# Altium PCB PCB_BBQ20_USB_Keyboard.pcbdoc
Units mil, origin at the board's own origin, x right, y up, seen from the top; angles counter-clockwise.
Board outline 4814 x 3968 mil, 2 copper layers (Top Layer, Bottom Layer); 64 components, 71 nets, 262 pads, 272 vias.
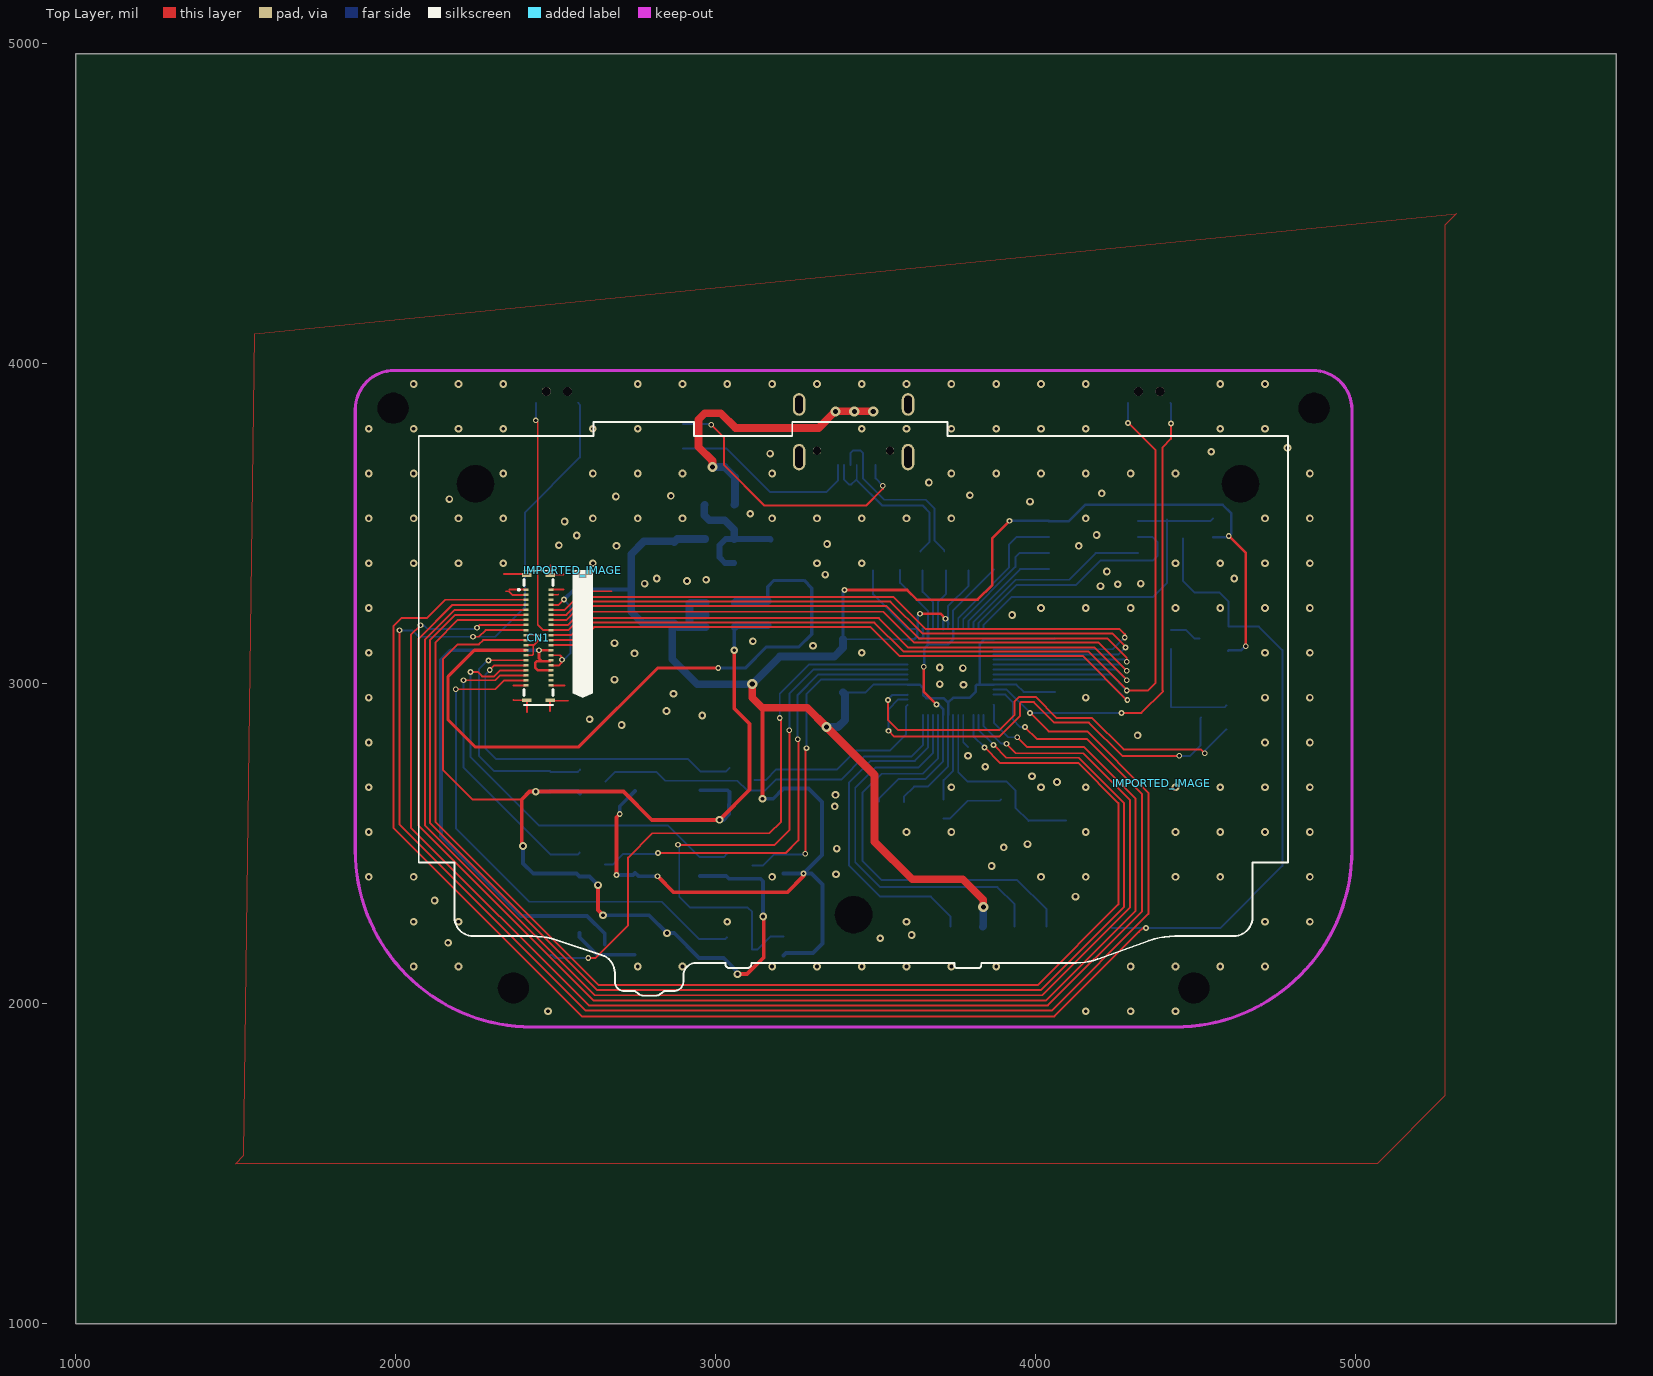
[diagram p0: Top Layer view]
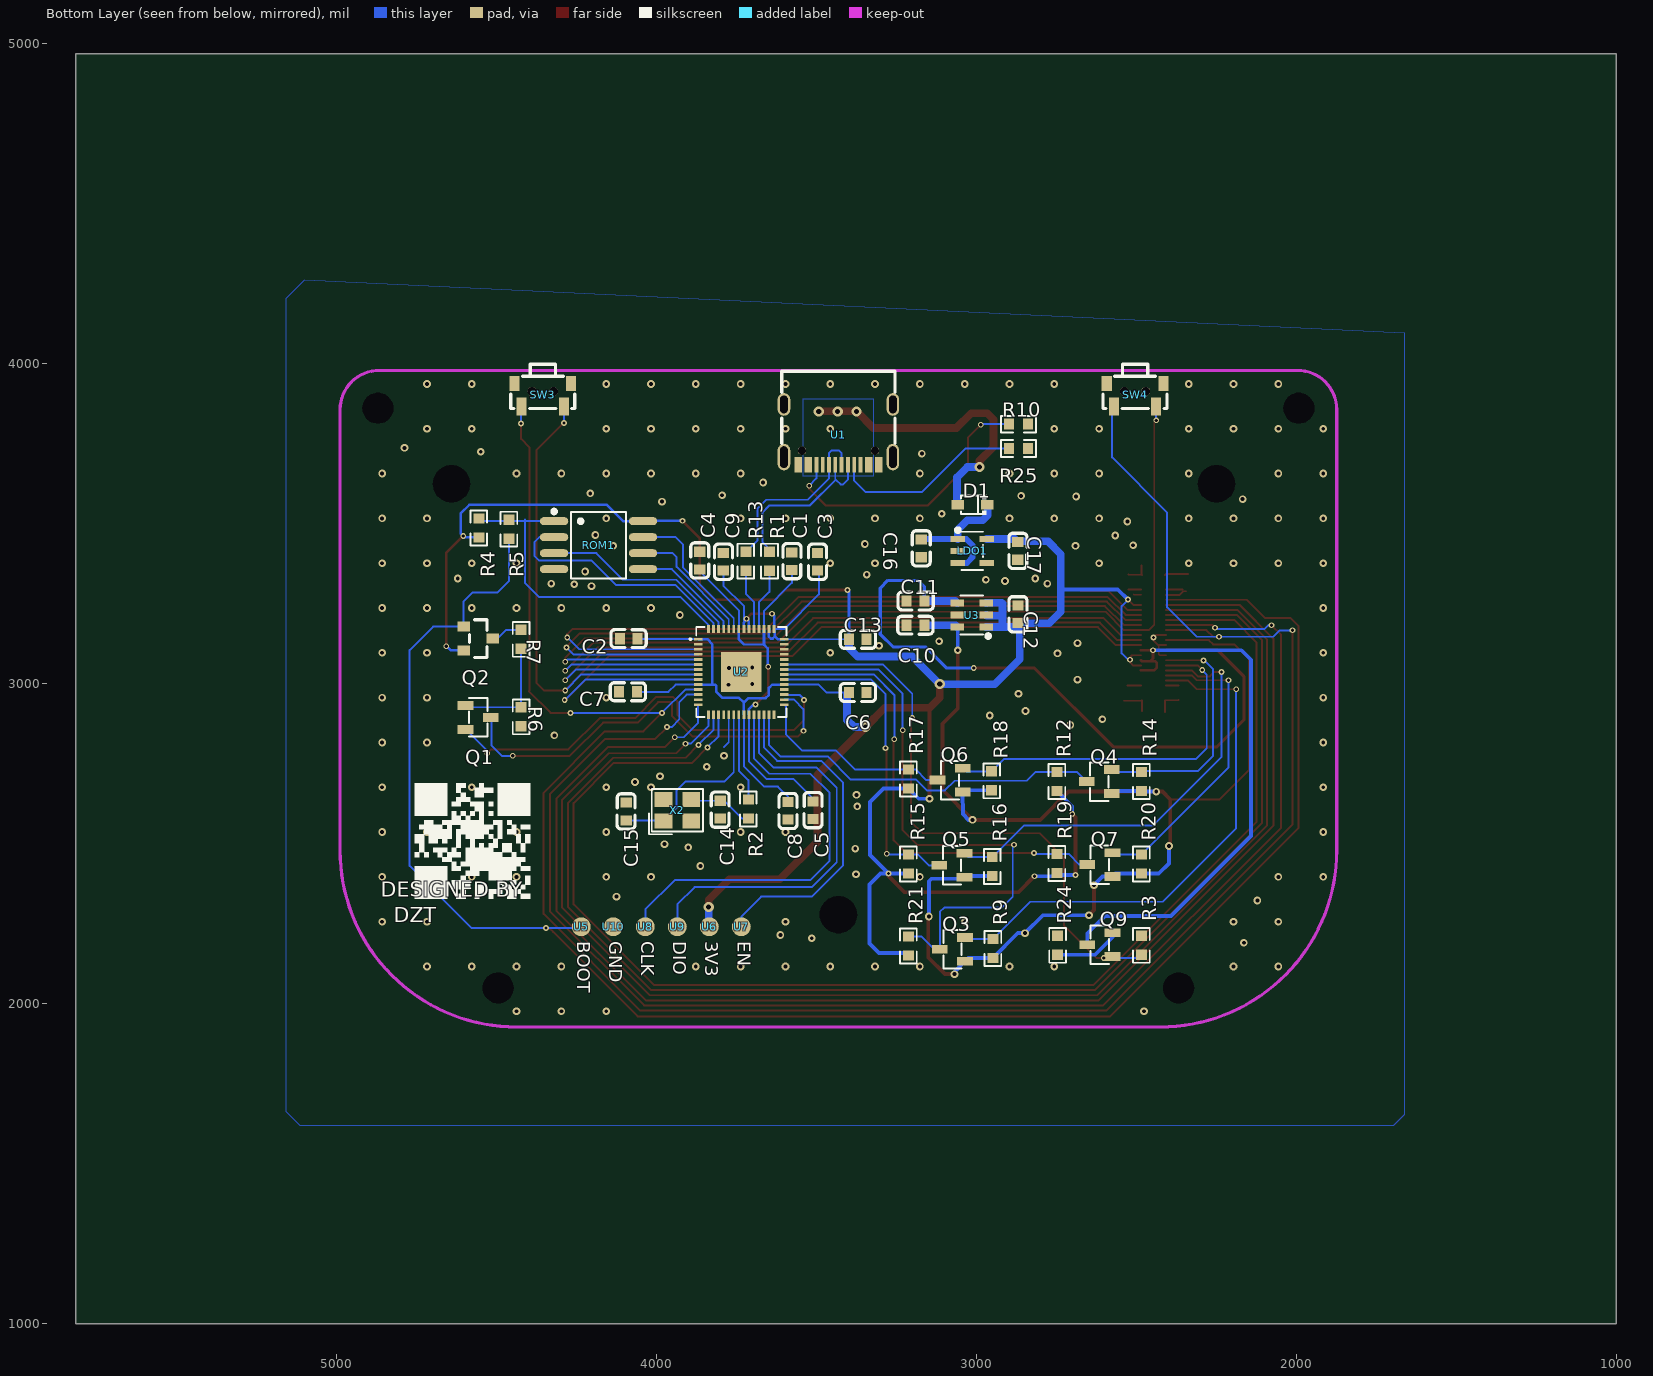
[diagram p1: Bottom Layer view, seen from below]

## Layer stack, top to bottom
Top Layer: signal copper (thickness not stored)
Dielectric: dielectric 12.6, FR-4, Dk 4.8
Bottom Layer: signal copper (thickness not stored)

## Board outline
5814,1000 1000,1000 1000,4968 5814,4968
cut-out: 2319.39,2048.87 cw(c2367.7,2048.87) 2416.01,2048.87 cw(c2367.7,2048.87) 2319.39,2048.87
cut-out: 4445.37,2048.87 cw(c4493.68,2048.87) 4541.99,2048.87 cw(c4493.68,2048.87) 4445.37,2048.87
cut-out: 4820.96,3859.89 cw(c4869.27,3859.89) 4917.58,3859.89 cw(c4869.27,3859.89) 4820.96,3859.89
cut-out: 1943.8,3859.89 cw(c1992.11,3859.89) 2040.42,3859.89 cw(c1992.11,3859.89) 1943.8,3859.89
cut-out: 4581.2,3623.67 cw(c4639.35,3623.67) 4697.5,3623.67 cw(c4639.35,3623.67) 4581.2,3623.67
cut-out: 2191.44,3623.67 cw(c2249.59,3623.67) 2307.74,3623.67 cw(c2249.59,3623.67) 2191.44,3623.67
cut-out: 3372.54,2278 cw(c3430.69,2278) 3488.84,2278 cw(c3430.69,2278) 3372.54,2278

## Components (designator, comment, footprint, x,y, rotation, side; value= is the part's Value field where it differs from the comment)
C1 "100nF" C0603 3576,3382 r90 bottom
C2 "100nF" C0603 4086,3140 r0 bottom
C3 "100nF" C0603 3496,3380 r90 bottom
C4 "100nF" C0603 3864,3384 r90 bottom
C5 "100nF" C0603 3510,2604 r90 bottom
C6 "100nF" C0603 3370,2972 r180 bottom
C7 "100nF" C0603 4088,2974 r0 bottom
C8 "100nF" C0603 3588,2602 r270 bottom
C9 "100nF" C0603 3790,3380 r90 bottom
C10 "10uF" C0603 3189.9,3181.9 r0 bottom
C11 "10uF" C0603 3189.9,3257.9 r180 bottom
C12 "10uF" C0603 2869.9,3215.9 r90 bottom
C13 "100nF" C0603 3370,3138 r180 bottom
C14 "20pF" C0603 3800,2606 r270 bottom
C15 "20pF" C0603 4094,2600 r90 bottom
C16 "10uF" C0603 3172,3422 r90 bottom
C17 "10uF" C0603 2870,3414 r90 bottom
CN1 "BM20B(0.8)-40DS-0.4V(51)" CONN-SMD_BM20B-0.8-40DS-0.4V-51 2446.44,3143.36 r90 top
D1 "B5819WS" SOD-323_L1.8-W1.3-LS2.5-RD 3012,3558 r180 bottom
IMPORTED_IMAGE "IMPORTED_IMAGE" IMPORTED_IMAGE 4394,2688 r0 top
IMPORTED_IMAGE "IMPORTED_IMAGE" IMPORTED_IMAGE 2554,3353 r0 top
LDO1 "ME6211C33M5G-N" SOT-23-5_L3.0-W1.7-P0.95-LS2.8-BL 3012.47,3414 r90 bottom
Q1 "S8050" SOT-23-3_L2.9-W1.3-P1.90-LS2.4-BR 4556,2894 r180 bottom
Q2 "AO3401A_C347476" SOT-23_L2.9-W1.3-P1.90-LS2.4-BR 4556,3140 r180 bottom
Q3 "AO3400A_C347475" SOT-23-3_L2.9-W1.3-P1.90-LS2.4-BR 3074.39,2169.45 r0 bottom
Q4 "AO3400A_C347475" SOT-23-3_L2.9-W1.3-P1.90-LS2.4-BR 2615.88,2693.46 r0 bottom
Q5 "AO3400A_C347475" SOT-23-3_L2.9-W1.3-P1.90-LS2.4-BR 3076,2432 r0 bottom
Q6 "AO3400A_C347475" SOT-23-3_L2.9-W1.3-P1.90-LS2.4-BR 3082,2698.03 r0 bottom
Q7 "AO3400A_C347475" SOT-23-3_L2.9-W1.3-P1.90-LS2.4-BR 2614,2434 r0 bottom
Q9 "AO3400A_C347475" SOT-23-3_L2.9-W1.3-P1.90-LS2.4-BR 2614,2184 r0 bottom
R1 "27Ω" R0603 3646,3382 r270 bottom
R2 "1kΩ" R0603 3712,2608 r270 bottom
R3 "10kΩ" R0603 2484,2182 r90 bottom
R4 "10kΩ" R0603 4554,3486 r90 bottom
R5 "1kΩ" R0603 4460,3482 r90 bottom
R6 "10kΩ" R0603 4422,2896 r270 bottom
R7 "10kΩ" R0603 4422,3138 r90 bottom
R9 "10kΩ" R0603 2948,2172 r90 bottom
R10 "5.1kΩ" R0603 2868,3810 r180 bottom
R12 "10kΩ" R0603 2748,2694 r90 bottom
R13 "27Ω" R0603 3720,3382 r270 bottom
R14 "10kΩ" R0603 2484,2694 r90 bottom
R15 "10kΩ" R0603 3212,2436 r90 bottom
R16 "10kΩ" R0603 2950,2428 r90 bottom
R17 "10kΩ" R0603 3212,2702 r90 bottom
R18 "10kΩ" R0603 2952,2696 r90 bottom
R19 "10kΩ" R0603 2748,2438 r90 bottom
R20 "10kΩ" R0603 2484,2436 r90 bottom
R21 "10kΩ" R0603 3212,2180 r90 bottom
R24 "10Ω" R0603 2746,2182 r90 bottom
R25 "5.1kΩ" R0603 2868,3734 r180 bottom
ROM1 "W25Q16JVSSIQ" SOIC-8_L5.3-W5.3-P1.27-LS8.0-BL 4180,3432 r90 bottom
SW3 "GT-TC018A-H0375-L1" SW-SMD_L4.7-W3.5-P3.35-EH 4354.31,3901.23 r0 bottom
SW4 "GT-TC018A-H0375-L1" SW-SMD_L4.7-W3.5-P3.35-EH 2503.92,3901.23 r0 bottom
U1 "GT-USB-7010ASV" USB-C-SMD_G-SWITCH_GT-USB-7010ASV 3430.69,3777.21 r180 bottom
U2 "RP2040" QFN-56_L7.0-W7.0-P0.90-TL-EP3.2 3734,3036 r0 bottom
U3 "VRD1828MTX" SOT-23-6_L2.9-W1.6-P0.95-LS2.8-BL 3013.9,3213.9 r270 bottom
U5 "NO" 测试焊盘 4234,2240 r0 bottom
U6 "NO" 测试焊盘 3834,2240 r0 bottom
U7 "NO" 测试焊盘 3734.01,2240 r0 bottom
U8 "NO" 测试焊盘 4034,2240 r0 bottom
U9 "NO" 测试焊盘 3934.01,2240 r0 bottom
U10 "NO" 测试焊盘 4134,2240 r0 bottom
X2 "12MHz" CRYSTAL-SMD_4P-L3.2-W2.5-BL 3934,2604 r0 bottom

## Footprints (in the part's own frame and the unit in brackets; to place one, negate y for a bottom-side part, rotate by r counter-clockwise, add the part's x,y. Pads: shape width x height; smd on the part's side, far side on the other; paste and mask are expansions set on the pad)
C0603 [mm]
  rect 0.8x0.9 smd paste+0 mask+0.051: 1(0.7,0) 2(-0.7,0)
  silkscreen extent -1.39,-0.72 1.41,0.71
CONN-SMD_BM20B-0.8-40DS-0.4V-51 [mm]
  rect 0.2x0.42 smd paste+0 mask+0.051: 1(3.8,0.99) 2(3.8,-0.99) 3(3.4,0.99) 4(3.4,-0.99) 5(3,0.99) 6(3,-0.99) 7(2.6,0.99) 8(2.6,-0.99) 9(2.2,0.99) 10(2.2,-0.99) 11(1.8,0.99) 12(1.8,-0.99) 13(1.4,0.99) 14(1.4,-0.99) 15(1,0.99) 16(1,-0.99) 17(0.6,0.99) 18(0.6,-0.99) 19(0.2,0.99) 20(0.2,-0.99) 21(-0.2,0.99) 22(-0.2,-0.99) 23(-0.6,0.99) 24(-0.6,-0.99) 25(-1,0.99) 26(-1,-0.99) 27(-1.4,0.99) 28(-1.4,-0.99) 29(-1.8,0.99) 30(-1.8,-0.99) 31(-2.2,0.99) 32(-2.2,-0.99) 33(-2.6,0.99) 34(-2.6,-0.99) 35(-3,0.99) 36(-3,-0.99) 37(-3.4,0.99) 38(-3.4,-0.99) 39(-3.8,0.99) 40(-3.8,-0.99)
  rect 0.3x0.75 smd paste+0 mask+0.051: 41(-4.975,0.925) 41(-4.975,-0.925) 42(4.975,-0.925) 42(4.975,0.925)
  silkscreen extent -5.33,-1.15 5.3,1.64
CRYSTAL-SMD_4P-L3.2-W2.5-BL [mm]
  rect 1.4x1.2 smd paste+0 mask+0.051: 1(1.1,0.85) 2(-1.1,0.85) 3(-1.1,-0.85) 4(1.1,-0.85)
  silkscreen extent -2.03,-1.68 2.26,1.91
IMPORTED_IMAGE [mil]
QFN-56_L7.0-W7.0-P0.90-TL-EP3.2 [mm]
  rect 0.665x0.224 smd paste+0 mask+0.051: 1(3.407,-2.6) 2(3.407,-2.2) 3(3.407,-1.8) 4(3.407,-1.4) 5(3.407,-1) 6(3.407,-0.6) 7(3.407,-0.2) 8(3.407,0.2) 9(3.407,0.6) 10(3.407,1) 11(3.407,1.4) 12(3.407,1.8) 13(3.407,2.2) 14(3.407,2.6) 29(-3.408,2.6) 30(-3.408,2.2) 31(-3.408,1.8) 32(-3.408,1.4) 33(-3.408,1) 34(-3.408,0.6) 35(-3.408,0.2) 36(-3.408,-0.2) 37(-3.408,-0.6) 38(-3.408,-1) 39(-3.408,-1.4) 40(-3.408,-1.8) 41(-3.408,-2.2) 42(-3.408,-2.6)
  rect 0.224x0.665 smd paste+0 mask+0.051: 15(2.6,3.407) 16(2.2,3.407) 17(1.8,3.407) 18(1.4,3.407) 19(1,3.407) 20(0.6,3.407) 21(0.2,3.407) 22(-0.2,3.407) 23(-0.6,3.407) 24(-1,3.407) 25(-1.4,3.407) 26(-1.8,3.407) 27(-2.2,3.407) 28(-2.6,3.407) 43(-2.6,-3.408) 44(-2.2,-3.408) 45(-1.8,-3.408) 46(-1.4,-3.408) 47(-1,-3.408) 48(-0.6,-3.408) 49(-0.2,-3.408) 50(0.2,-3.408) 51(0.6,-3.408) 52(1,-3.408) 53(1.4,-3.408) 54(1.8,-3.408) 55(2.2,-3.408) 56(2.6,-3.408)
  rect 3.2x3.2 smd paste+0 mask+0.051: 57(0,0)
  silkscreen extent -3.58,-3.58 4.11,3.58
R0603 [mil]
  rect 31.75x34.02 smd paste-3937.01 mask+2: 1(29.66,0) 2(-29.66,0)
  silkscreen extent -55,-26 55,26
SOD-323_L1.8-W1.3-LS2.5-RD [mm]
  rect 1x0.75 smd paste+0 mask+0.051: 1(1.173,0) 2(-1.173,0)
  silkscreen extent -0.9,-0.8 1.08,0.8
SOIC-8_L5.3-W5.3-P1.27-LS8.0-BL [mm]
  oval 0.63x2.25 smd paste+0 mask+0.051: 1(1.905,3.53) 2(0.635,3.53) 3(-0.635,3.53) 4(-1.905,3.53) 5(-1.905,-3.53) 6(-0.635,-3.53) 7(0.635,-3.53) 8(1.905,-3.53)
  silkscreen extent -2.64,-2.18 2.82,3.68
SOT-23-3_L2.9-W1.3-P1.90-LS2.4-BR [mm]
  rect 1.25x0.7 smd paste+0 mask+0.051: 1(-1,0.95) 2(-1,-0.95) 3(1,0)
  silkscreen extent -0.73,-1.53 0.73,1.53
SOT-23-5_L3.0-W1.7-P0.95-LS2.8-BL [mm]
  rect 0.49x1.157 smd paste+0 mask+0.051: 1(0.95,1.154) 2(0,1.154) 3(-0.95,1.154)
  rect 0.49x1.175 smd paste+0 mask+0.051: 4(-0.95,-1.154) 5(0.95,-1.154)
  silkscreen extent -1.53,-0.85 1.8,1.29
SOT-23-6_L2.9-W1.6-P0.95-LS2.8-BL [mm]
  rect 0.532x1.072 smd paste+0 mask+0.051: 1(0.95,1.149) 2(0,1.149) 3(-0.95,1.149) 4(-0.95,-1.149) 5(0,-1.149) 6(0.95,-1.149)
  silkscreen extent -1.54,-0.89 1.82,1.45
SOT-23_L2.9-W1.3-P1.90-LS2.4-BR [mm]
  rect 1x0.8 smd paste+0 mask+0.051: 1(-1.15,0.95) 2(-1.15,-0.95) 3(1.15,0)
  silkscreen extent -0.7,-1.5 0.7,1.5
SW-SMD_L4.7-W3.5-P3.35-EH [mm]
  rect 0.8x1.4 smd paste+0 mask+0.051: 1(1.675,0.918) 2(-1.675,0.918)
  rect 0.8x1.2 smd paste+0 mask+0.051: 3(2.25,-0.917) 4(-2.25,-0.917)
  round 0.7 hole 0.7 unplated paste+0: ""(-0.85,-0.282) ""(0.85,-0.282)
  silkscreen extent -2.54,-2.43 2.54,1.07
USB-C-SMD_G-SWITCH_GT-USB-7010ASV [mm]
  oval 1x2.1 hole 0.6 slot 1.7 at 90 deg paste+0 mask+0.05: 1(4.32,-1.78) 2(-4.32,-1.78)
  oval 1x1.8 hole 0.6 slot 1.4 at 90 deg paste+0 mask+0.05: 3(-4.32,2.4) 4(4.32,2.4)
  rect 0.6x1.24 smd paste-100 mask+0.05: A1B12(3.2,-2.4) A4B9(2.4,-2.4) B1A12(-3.2,-2.4) B4A9(-2.4,-2.4)
  rect 0.3x1.24 smd paste-100 mask+0.05: A5(1.25,-2.4) A6(0.25,-2.4) A7(-0.25,-2.4) A8(-1.25,-2.4) B5(-1.75,-2.4) B6(-0.75,-2.4) B7(0.75,-2.4) B8(1.75,-2.4)
  round 0.65 hole 0.65 unplated paste+0: ""(-2.89,-1.28) ""(2.9,-1.28)
  silkscreen extent -4.5,-0.69 4.5,5.03
测试焊盘 [mil]
  round 59.05 smd paste+0 mask+4: 1(0,0)

## Via types
v1: diameter 24, hole 12, Top Layer to Bottom Layer, tented both sides, 207 vias
v2: diameter 18, hole 10, Top Layer to Bottom Layer, tented both sides, 58 vias
v3: diameter 32, hole 16, Top Layer to Bottom Layer, tented both sides, 7 vias

## Nets (pads, with @x,y where several pads share a name; then routed paths per layer and width w, separated by ;. In a path a pad name is that pad's centre, name@x,y a point inside that pad or via, vN(x,y) a via of type N, cw(c..) or ccw(c..) an arc to the next point about the centre after c; other vN are vias at no path point)
1V1: C1.2 C4.2 C5.1 U2.23 U2.45 U2.50 | length 1282.1
  Top Layer w8: v2(3650,3052) 3650,2974 v2(3690,2934)
  Bottom Layer w6: C5.1 3510,2640 3572,2702 3656,2702 3710.38,2756.38 U2.23 ; C1.2 3576,3314 3663.14,3226.86 U2.45 ; U2.50 3741.9,3228.3 C4.2@3870,3356.4
  Bottom Layer w8: v2(3650,3052) 3652,3054 3652,3110 3663.14,3121.14 U2.45 ; 3663.1,3121.1 3726,3122 3741.9,3137.9 U2.50 ; v2(3690,2934) 3696,2934 3710.38,2919.62 U2.23
1V8: C10.2 CN1.21 Q3.1 Q4.1 Q5.1 Q6.1 Q7.1 R9.2 R14.2 R16.2 R18.2 R20.2 U3.6 | length 4299.9
  Top Layer w6: 2394,2638 2240,2638 2148,2730 2148,3010 2148,3076 2194,3122 2260,3122 2273.49,3135.49 CN1.21
  Top Layer w12: v1(2398,2492) 2394,2496 2394,2638 2418,2662 v1(2438,2662) 2712,2662 2800,2574 v1(3012,2574) 3106,2668 3106,2874 3058,2922 v1(3058,3104) ; v1(2632,2370) 2632,2292 v1(2648,2276) ; v1(3068,2092) 3098,2092 3150,2144 3150,2270 v1(3148,2272)
  Bottom Layer w12: v1(2398,2492) 2398,2438 2430,2406 R20.2 ; v1(2438,2662) 2481.66,2662 R14.2 2568.23,2664.34 Q4.1 ; R20.2 2564.89,2406.34 Q7.1 2605.4,2396.6 v1(2632,2370) ; v1(2648,2276) 2792,2276 v1(2848,2220) 2870.34,2220 R9.2 3024.73,2142.34 Q3.1 3068,2099.07 v1(3068,2092) ; R16.2 3032.89,2398.34 Q5.1 3041.23,2390 3140,2390 3148,2382 v1(3148,2272) ; R18.2 3036.92,2666.34 Q6.1 ; v1(3012,2574) 3024,2574 3042,2592 Q6.1 ; v1(3058,3104) 3058,3175.36 U3.6
  Bottom Layer w24: U3.6 3064.54,3181.9 C10.2
2V8: C11.1 CN1.25 U3.4 | length 2180.1
  Top Layer w10: CN1.25 2246,3104 2164,3022 2164,2886 2248,2802 2572,2802 2818,3048 v2(3008,3048)
  Bottom Layer w10: v2(3008,3048) 3092,3048 3158,3114 3260,3114 3300,3154 3300,3298 3276,3322 3182,3322 3162.34,3302.34 C11.1
  Bottom Layer w24: U3.4 3065.74,3257.9 C11.1
3V3: C2.2 C3.2 C6.2 C7.2 C8.2 C9.2 C12.2 C13.2 C17.1 CN1.8 CN1.28 CN1.32 LDO1.5 Q2.2 R4.2 R12.2 R15.2 R17.2 R19.2 R21.2 ROM1.8 U2.1 U2.10 U2.22 U2.33 U2.42 U2.43 U2.44 U2.48 U2.49 U3.1 U3.2 U3.3 U6.1 | length 10329.5
  Top Layer w6: CN1.32 2510.8,3056.7 2518,3064 2518,3084 2514,3088 CN1.28 ; CN1.8 2509.73,3245.73 v2(2526,3262)
  Top Layer w8: v2(3402,3292) 3598,3292 3628,3262 3818,3262 3864,3308 3864,3454 v2(3918,3508) ; v2(3638,3218) 3702,3218 v2(3718,3202) ; v2(4603.02,3461.02) 4656,3408.04 v2(4656,3116)
  Top Layer w12: v2(2690,2402) 2690,2582 v2(2700,2592) ; v2(2818,2398) 2868,2348 3224,2348 3274.3,2398.3 v2(3274.3,2406.3) ; v1(3146,2640) 3146,2924
  Top Layer w24: v3(3114,2998) 3114,2956 3146,2924 3286,2924 v3(3346,2864) 3496,2714 3496,2506 3614,2388 3772,2388 3836,2324 v3(3836,2302)
  Bottom Layer w6: v2(2520,3074) 2526,3074 2546,3094 2546,3242 v2(2526,3262) ; C6.2 3468,2972 3492.63,2996.63 U2.33 ; C13.2 U2.42 ; C3.2@3492,3352.44 3492,3278 3599.85,3170.15 U2.43 ; C8.2 3588,2646 3620,2678 3662,2678 3726.13,2742.13 U2.22 ; U2.49 3726.13,3242.13 3790,3306 C9.2 ; U2.10 3939.37,2996.63 3962,2974 C7.2 ; U2.1 4056.8,3138.36 C2.2
  Bottom Layer w8: C13.2 3397.56,3287.56 v2(3402,3292) ; U2.33 3637.37,2996.63 3648,2986 3648,2964 3658,2954 3712,2954 3726.13,2939.87 ; U2.42 3620.36,3138.36 3630,3148 ; v2(3638,3218) 3631.64,3211.64 U2.43 3630,3168.51 3630,3148 ; U2.44 3648,3146 3642,3140 3636,3140 3630,3146 3630,3148 ; U2.48 3710.4,3194.4 v2(3718,3202) 3726.1,3189.9 3726.1,3185.4 ; U2.22 3726.13,2939.87 ; 3824.46,2996.63 3824.46,3122.46 3840.36,3138.36 U2.1 ; U2.10 3816.63,2996.63 3812,2992 3812,2974 3794,2956 3742.26,2956 3726.13,2939.87 ; v2(3918,3508) 4040.02,3508 ROM1.8 4103,3507 4154,3558 4584,3558 4610,3532 4610,3468 v2(4603.02,3461.02) 4598.34,3456.34 R4.2 ; Q2.2 4602.68,3104 4642,3104 4654,3116 v2(4656,3116)
  Bottom Layer w12: v2(2526,3262) 2558.11,3294.11 2736,3294.11 ; v2(2690,2402) 2741.66,2402 R19.2 2758.34,2398 v2(2818,2398) ; v2(2700,2592) 2700,2616.34 R12.2 ; v1(3146,2640) 3179.66,2640 R17.2 ; R21.2 3219.66,2158 3304,2158 3334,2188 3334,2372 3299.7,2406.3 v2(3274.3,2406.3) ; R15.2 v2(3274.3,2406.3) ; R17.2 3290,2672 3332,2630 3332,2464 v2(3274.3,2406.3)
  Bottom Layer w24: 2918.07,3176.5 2918.07,3250.07 2920,3252 U3.3 ; 2924,3212 2966.76,3212 U3.2 ; LDO1.5@2967.05,3451.4 2879.84,3451.4 C17.1 2867.56,3444 2776,3444 2736,3404 2736,3224 2771.66,3188.34 C12.2 ; U3.1 2881.74,3176.5 C12.2 ; v3(3346,2864) 3382,2864 3404,2886 3404,2965.56 C6.2 ; C13.2 3397.56,3111.56 3370,3084 3200,3084 v3(3114,2998) 2942,2998 2864,3076 2864,3182.44 C12.2 ; U6.1 3836,2242 v3(3836,2302)
CN1_34: CN1.26 CN1.30 CN1.34 Q9.3 | length 1735.7
  Top Layer w8: CN1.34 2445,3041 2436,3050 2436,3064 2442,3070 2456,3070 ; CN1.30 2482.91,3070 2456,3070 ; CN1.26 v2(2448,3104) 2448,3078 2456,3070
  Bottom Layer w12: v2(2448,3104) 2172,3104 2142,3074 2142,2524 2392,2274 2598,2274 2653.4,2218.6 Q9.3
COL1: CN1.17 SW3.1 SW4.1 U2.11 | length 6990.3
  Top Layer w6: v2(2012,3166) 2012,2560 2594,1978 4050,1978 4352,2280 4352,2658 4160,2850 4040,2850 v2(3982,2908) ; v2(2242,3146) 2260,3146 2280.99,3166.99 CN1.17 ; v2(4268,2908) 4330,2908 4398,2976 4396,2978 4396,3738 4422,3764 v2(4422,3812)
  Bottom Layer w6: v2(2012,3166) 2052,3166 2072,3146 v2(2242,3146) 2312,3146 2404,3238 2404,3534 2576,3706 2576,3870.8 SW4.1@2569.9,3876.9 ; U2.11 3909.1,2980.9 v2(3982,2908) v2(4268,2908) ; SW3.1@4420.26,3876.91 4422,3875.17 v2(4422,3812)
COL2: CN1.15 U2.12 | length 4610.5
  Top Layer w6: v2(2078,3182) 2048,3152 2048,2550 2604,1994 4038,1994 4332,2288 4332,2654 4160,2826 4004,2826 v2(3966,2864) ; v2(2254,3174) 2262.74,3182.74 CN1.15
  Bottom Layer w6: v2(2078,3182) 2088,3182 2100,3170 2250,3170 v2(2254,3174) ; U2.12 3904.9,2965.1 3928,2942 3928,2888 3952,2864 v2(3966,2864)
COL3: CN1.13 U2.17 | length 4244.8
  Top Layer w6: CN1.13 2194.5,3198.5 2124,3128 2124,2568 2634,2058 4006,2058 4258,2310 4258,2626 4132,2752 3888,2752 v2(3840,2800)
  Bottom Layer w6: U2.17 3804.86,2835.14 v2(3840,2800)
COL4: CN1.11 U2.16 | length 4316.7
  Top Layer w6: CN1.11 2186.2,3214.2 2108,3136 2108,2564 2630,2042 4016,2042 4276,2302 4276,2626 4134,2768 3908,2768 v2(3868,2808)
  Bottom Layer w6: U2.16 3820.62,2855.38 v2(3868,2808)
COL5: CN1.9 U2.15 | length 4394.5
  Top Layer w6: CN1.9 2184,3230 2092,3138 2092,2556 2622,2026 4020,2026 4294,2300 4294,2636 4148,2782 3938,2782 v2(3908,2812)
  Bottom Layer w6: U2.15 3836,2868 3892,2812 v2(3908,2812)
COL6: CN1.7 U2.14 | length 4493.6
  Top Layer w6: CN1.7 2177.7,3245.7 2072,3140 2072,2556 2618,2010 4032,2010 4312,2290 4312,2640 4150,2802 3972,2802 v2(3942,2832)
  Bottom Layer w6: U2.14 3870,2931.79 3870,2876 3914,2832 v2(3942,2832)
COL7: CN1.5 Q2.1 R5.2 U5.1 | length 5657.4
  Top Layer w6: CN1.5 2155.5,3261.5 2098,3204 2018,3204 1994,3180 1994,2548 2582,1960 4058,1960 4322,2224 4334,2236 v2(4344,2236)
  Bottom Layer w6: U5.1 4238,2236 4576,2236 4770,2430 4770,3104 4696.6,3177.4 Q2.1 4601.3,3256.7 4574,3284 4496,3284 4460,3320 R5.2
COL8: Q1.3 U2.30 | length 1361.5
  Top Layer w6: v2(3540,2852) 3558,2834 3886,2834 3950,2898 3950,2938 3954,2942 3994,2942 4058,2878 4166,2878 4270,2774 v2(4448,2774)
  Bottom Layer w6: v2(3540,2852) 3540,2920 3569.4,2949.4 U2.30 ; v2(4448,2774) 4482,2774 4514,2806 4514,2891.37 Q1.3
EXTERN_5V: D1.2 U1.A4B9 U1.B4A9 | length 931.1
  Top Layer w24: v3(2990,3676) 2990,3696 2946,3740 2946,3824 2966,3844 3016,3844 3062,3798 3226,3798 3322,3798 v3(3374,3850) v3(3492,3850)
  Bottom Layer w24: v3(2990,3676) 3028,3676 3060,3644 3060,3559.84 D1.2
  other v3: 3433,3850
GND: C1.1 C2.1 C3.1 C4.1 C5.2 C6.1 C7.1 C8.1 C9.1 C10.1 C11.2 C12.1 C13.1 C14.1 C15.1 C16.2 C17.2 CN1.1 CN1.2 CN1.3 CN1.4 CN1.10 CN1.19 CN1.23 CN1.27 CN1.39 CN1.40 CN1.41 CN1.42 LDO1.2 R3.1 R6.1 R10.1 R24.1 R25.1 ROM1.4 U1.1 U1.2 U1.3 U1.4 U1.A1B12 U1.B1A12 U2.19 U2.57 U3.5 U10.1 X2.2 X2.4 | length 1044.2
  Top Layer w6: 2338,3342 2407.25,3342 CN1.42@2410.02,3339.23 ; 2344,3288 2354,3288 2366,3276 2406.23,3276 CN1.3 ; 2356,3294 2406.43,3294 CN1.1 ; 2368,2948 2410,2947.5 2410,2910 ; 2368,2994 CN1.39 ; CN1.27 2426.25,3088.25 2430,3092 2430,3118 2431.74,3119.74 ; CN1.23 2431.74,3119.74 ; CN1.19 2438.56,3151.24 v2(2446.44,3143.36) 2446.44,3134.44 2431.74,3119.74 ; 2482,2914 CN1.41@2482.9,2947.5 ; CN1.41@2482.86,2947.5 2484.36,2946 2538,2946 ; CN1.42@2482.85,3339.23 2484,3340.38 2484,3368 ; CN1.42@2482.9,3339.2 2524,3340 ; CN1.40 2528,2994 ; CN1.10 2528,3230 2586,3288 2674,3288 ; CN1.4 2508,3278 ; CN1.2 2486.44,3294 2524,3294
  Bottom Layer w6: U2.19 3773.37,2816.63 3788,2802
  other v1: 2476.2,1975.8 4156.2,1975.8 4296.2,1975.8 4436.2,1975.8 2056.2,2115.8 2196.2,2115.8 2756.2,2115.8 2896.2,2115.8 3176.2,2115.8 3316.2,2115.8 3456.2,2115.8 3596.2,2115.8 3736.2,2115.8 3876.2,2115.8 4296.2,2115.8 4436.2,2115.8 4576.2,2115.8 4716.2,2115.8 2164,2190 3514,2204 3612,2214 2056.2,2255.8 2196.2,2255.8 3036.2,2255.8 3596.2,2255.8 4716.2,2255.8 4856.2,2255.8 2122,2322 4124,2334 1916.2,2395.8 2056.2,2395.8 3176.2,2395.8 4016.2,2395.8 4156.2,2395.8 4436.2,2395.8 4576.2,2395.8 4856.2,2395.8 3376,2404 3862,2430 3378,2484 3900,2488 3974,2498 1916.2,2535.8 3596.2,2535.8 3736.2,2535.8 4156.2,2535.8 4436.2,2535.8 4576.2,2535.8 4716.2,2535.8 4856.2,2535.8 3372,2616 3374,2652 1916.2,2675.8 3736.2,2675.8 4016.2,2675.8 4156.2,2675.8 4436.2,2675.8 4576.2,2675.8 4716.2,2675.8 4856.2,2675.8 4066,2692 3988,2710 3842,2740 3788,2774 1916.2,2815.8 4716.2,2815.8 4856.2,2815.8 4318,2838 2706,2870 2606,2888 2958,2900 2846,2914 1916.2,2955.8 4156.2,2955.8 4716.2,2955.8 4856.2,2955.8 2868,2968 3774,2996 3700,2998 2684,3012 3772,3048 3700,3050 2746,3094 1916.2,3095.8 3456.2,3095.8 4716.2,3095.8 4856.2,3095.8 3304,3118 2684,3126 3116,3132 3926,3214 1916.2,3235.8 4016.2,3235.8 4156.2,3235.8 4296.2,3235.8 4436.2,3235.8 4576.2,3235.8 4716.2,3235.8 4856.2,3235.8 4202,3304 4256,3310 2778,3312 4328,3312 2910,3320 2970,3324 2816,3328 4620,3328 3342,3340 4222,3350 1916.2,3375.8 2056.2,3375.8 2196.2,3375.8 2336.2,3375.8 2616.2,3375.8 3316.2,3375.8 3456.2,3375.8 4436.2,3375.8 4576.2,3375.8 4716.2,3375.8 4856.2,3375.8 2690,3430 4134,3430 2510,3432 3348,3436 2566,3462 4190,3464 2528,3506 1916.2,3515.8 2056.2,3515.8 2196.2,3515.8 2336.2,3515.8 2616.2,3515.8 2756.2,3515.8 2896.2,3515.8 3176.2,3515.8 3316.2,3515.8 3456.2,3515.8 3596.2,3515.8 3736.2,3515.8 4156.2,3515.8 4716.2,3515.8 4856.2,3515.8 3108,3530 3982,3568 2168,3576 2688,3584 2860,3586 3794,3588 4206,3594 3666,3628 1916.2,3655.8 2056.2,3655.8 2336.2,3655.8 2616.2,3655.8 2756.2,3655.8 2896.2,3655.8 3176.2,3655.8 3736.2,3655.8 3876.2,3655.8 4016.2,3655.8 4156.2,3655.8 4296.2,3655.8 4436.2,3655.8 4856.2,3655.8 3170,3718 4548,3724 4786,3736 1916.2,3795.8 2056.2,3795.8 2196.2,3795.8 2336.2,3795.8 2616.2,3795.8 2756.2,3795.8 3456.2,3795.8 3596.2,3795.8 3736.2,3795.8 3876.2,3795.8 4016.2,3795.8 4156.2,3795.8 4576.2,3795.8 4716.2,3795.8 2056.2,3935.8 2196.2,3935.8 2336.2,3935.8 2756.2,3935.8 2896.2,3935.8 3036.2,3935.8 3176.2,3935.8 3316.2,3935.8 3456.2,3935.8 3596.2,3935.8 3736.2,3935.8 3876.2,3935.8 4016.2,3935.8 4156.2,3935.8 4576.2,3935.8 4716.2,3935.8
GPIO0: U2.2
GPIO10: U2.13
GPIO15: U2.18
GPIO16: Q4.3 R12.1 U2.27 | length 1181.5
  Bottom Layer w6: Q4.3@2655.25,2693.46 2685.45,2723.66 R12.1 2814.34,2723.66 2842,2696 3068,2696 3098,2666 3154,2666 3188,2700 3392,2700 3464,2772 3612,2772 3647.39,2807.39 U2.27
GPIO17: U2.28
GPIO18: Q6.3 R17.1 U2.29 | length 627.5
  Bottom Layer w6: Q6.3 3156,2698 3189.7,2731.7 R17.1 ; R17.1 3379.66,2731.66 3438,2790 3544,2790 3594,2840 3594,2927.79 U2.29
GPIO21: U2.32
GPIO22: Q5.3 R15.1 U2.34 | length 1015.4
  Top Layer w6: v2(3280,2468) 3280,2794 v2(3284,2798)
  Bottom Layer w6: Q5.3 3148,2432 3181.7,2465.7 R15.1 ; R15.1 3277.66,2465.66 v2(3280,2468) ; v2(3284,2798) 3284,2968 3328.4,3012.4 U2.34
GPIO23: Q7.3 R19.1 U2.35 | length 1461.3
  Top Layer w6: v2(2820,2470) 3218,2470 3258,2510 3258,2824 v2(3256,2826)
  Bottom Layer w6: Q7.3 2678,2434 2711.7,2467.7 R19.1 ; R19.1 2817.66,2467.66 v2(2820,2470) ; v2(3256,2826) 3256,2964 3320.1,3028.1 U2.35
GPIO24: Q3.3 R21.1 U2.36 | length 1837.2
  Top Layer w6: v2(2882,2496) 3184,2496 3230,2542 v2(3230,2854)
  Bottom Layer w6: v2(2882,2496) 2886,2492 2886,2334 2920,2300 3100,2300 3113.76,2286.24 Q3.3 ; Q3.3 3131.4,2169.4 3171.7,2209.7 R21.1 ; v2(3230,2854) 3230,2968 3305.9,3043.9 U2.36
GPIO26_ADC0: U2.38
GPIO27_ADC1: U2.39
GPIO28_ADC2: U2.40
GPIO29_ADC3: U2.41
KBD_BLK: Q9.1 R3.2 U2.37 | length 1864.3
  Top Layer w6: v2(2602,2142) 2624,2142 2726,2244 2726,2456 2802,2532 3168,2532 3204,2568 3204,2888 v2(3200,2892)
  Bottom Layer w6: R3.2 2487.7,2152.3 2498,2142 v2(2602,2142) ; v2(3200,2892) 3200,2968 3291.6,3059.6 U2.37
OUT: Q1.1 R6.2 R7.2 | length 358.4
  Bottom Layer w6: R7.2 R6.2 4589.63,2925.66 Q1.1
Q2_3: Q2.3 R7.1 | length 100
  Bottom Layer w6: R7.1 4467.7,3167.7 4496,3140 Q2.3
QSPI_SCLK: ROM1.6 U2.52 | length 401.5
  Bottom Layer w6: U2.52 3773.4,3201.4 3936,3364 3936,3394 3949,3407 ROM1.6
QSPI_SD0: ROM1.5 U2.53 | length 343.9
  Bottom Layer w6: U2.53 3789.1,3195.1 3951,3357 ROM1.5
QSPI_SD1: ROM1.2 U2.55 | length 775.7
  Bottom Layer w6: U2.55 3820.6,3188.6 3940,3308 4126,3308 4202,3384 4366,3384 4380,3398 4380,3442 4365,3457 ROM1.2
QSPI_SD2: ROM1.3 U2.54 | length 624.3
  Bottom Layer w6: U2.54 3804.9,3190.9 3938,3324 4104,3324 4187,3407 ROM1.3
QSPI_SD3: ROM1.7 U2.51 | length 463.9
  Bottom Layer w6: U2.51 3757.6,3203.6 3916,3362 3916,3434 3939,3457 ROM1.7
QSPI_SS: R4.1 R5.1 ROM1.1 U2.56 | length 1076.6
  Bottom Layer w6: U2.56 3836.4,3182.4 3924,3270 4366,3270 4410,3314 4410,3511.7 ; ROM1.1 4545.34,3507 R4.1
R1_1: R1.1 U2.46 | length 195.7
  Bottom Layer w6: R1.1 3646,3286 3678.9,3253.1 U2.46
R2_1: C14.2 R2.1 X2.3 | length 203.2
  Bottom Layer w6: R2.1 3732.3,2578.3 3787.6,2633.6 C14.2 ; C14.2 3886.78,2633.56 X2.3
R13_1: R13.1 U2.47 | length 192.6
  Bottom Layer w6: U2.47 3694.6,3254.6 3720,3280 R13.1
R24_2: Q9.2 R24.2 | length 208.2
  Bottom Layer w12: Q9.2 2574.6,2207.4 2629.7,2152.3 R24.2
ROW1: CN1.12 U2.3 | length 2298.8
  Top Layer w6: CN1.12 2533.77,3214.23 2590,3270 3556,3270 3656,3170 4262,3170 4278,3154 v2(4278,3144)
  Bottom Layer w6: U2.3 4240.86,3106.86 v2(4278,3144)
ROW2: CN1.14 U2.4 | length 2300.9
  Top Layer w6: CN1.14 2534.48,3198.48 2592,3256 3546,3256 3646,3156 4240,3156 4280,3116 v2(4280,3112)
  Bottom Layer w6: U2.4 4259.12,3091.12 v2(4280,3112)
ROW3: CN1.16 U2.5 | length 2321.1
  Top Layer w6: CN1.16 2538.74,3182.74 2598,3242 3534,3242 3636,3140 4224,3140 4284,3080 v2(4284,3068)
  Bottom Layer w6: U2.5 4276.63,3075.37 v2(4284,3068)
ROW4: CN1.18 SW4.2 U2.6 | length 3066.2
  Top Layer w6: v2(2438,3822) 2444,3816 2444,3184 2461,3167 CN1.18 2538.99,3166.99 2596,3224 3524,3224 3620,3128 4196,3128 v2(4284,3040)
  Bottom Layer w6: v2(2438,3822) SW4.2@2438,3876.9 ; U2.6 4264.38,3059.62 v2(4284,3040)
ROW5: CN1.20 U2.7 | length 2331.9
  Top Layer w6: CN1.20 2549.24,3151.24 2602,3204 3510,3204 3602,3112 4184,3112 4284,3012 v2(4284,3010)
  Bottom Layer w6: U2.7 4250.13,3043.87 v2(4284,3010)
ROW6: CN1.22 SW3.2 U2.8 | length 3357.2
  Top Layer w6: CN1.22 2559.49,3135.49 2614,3190 3496,3190 3586,3100 4164,3100 4284,2980 v2(4284,2978) 4350,2978 4374,3002 4374,3728 v2(4288,3814)
  Bottom Layer w6: U2.8 4233.88,3028.12 v2(4284,2978) ; v2(4288,3814) SW3.2@4288.4,3876.9
ROW7: CN1.24 U2.9 | length 2362.9
  Top Layer w6: CN1.24 2563.74,3119.74 2620,3176 3484,3176 3574,3086 4146,3086 4284,2948 v2(4286,2948)
  Bottom Layer w6: U2.9 4221.62,3012.38 v2(4286,2948)
ROW8: Q1.2 U2.31 | length 1378.5
  Top Layer w6: v2(3538,2948) 3538,2886 3570,2854 3886,2854 3934,2902 3934,2944 3948,2958 4000,2958 4066,2892 4176,2892 4274,2794 4516,2794 v2(4528,2782)
  Bottom Layer w6: v2(3538,2948) 3538,2950 3552,2964 3598.72,2964 U2.31 ; v2(4528,2782) 4528,2789.23 Q1.2
RUN: U2.26 U7.1 | length 1069.3
  Bottom Layer w6: U2.26 3663.1,2799.1 3622,2758 3484,2758 3416,2690 3416,2432 3514,2334 3672,2334 3734,2272 U7.1
S$7924: 
S$13251: 
S$26683: 
S$26687: 
S$26691: 
S$26695: 
SWCLK: U2.24 U8.1 | length 1321.7
  Bottom Layer w6: U2.24 3694.6,2766.6 3646,2718 3518,2718 3458,2658 3458,2446 3518,2386 3942,2386 4034,2294 U8.1
SWDIO: U2.25 U9.1 | length 1261.6
  Bottom Layer w6: U2.25 3678.9,2782.9 3634,2738 3500,2738 3436,2674 3436,2442 3514,2364 3880,2364 3934,2310 U9.1
TP_MOTION_1V8: CN1.33 Q5.2 R16.1 | length 1390
  Top Layer w6: v2(2234,3036) 2256,3036 2270,3022 2308,3022 2327,3041 CN1.33
  Bottom Layer w6: v2(2234,3036) 2234,2770 2448,2556 2851.66,2556 R16.1 3024.89,2457.66 Q5.2
TP_RESET_1V8: CN1.29 Q4.2 R14.1 | length 769.4
  Top Layer w6: v2(2290,3072) CN1.29
  Bottom Layer w6: v2(2290,3072) 2288,3072 2260,3044 2260,2774 2308,2726 2481.66,2726 R14.1 2569.31,2723.66 Q4.2
TP_SCL_1V8: CN1.35 Q7.2 R20.1 | length 951.9
  Top Layer w6: v2(2212,3010) 2312,3010 2327.3,3025.3 CN1.35
  Bottom Layer w6: v2(2212,3010) 2212,2737.66 R20.1 2568.89,2465.66 Q7.2
TP_SDA_1V8: CN1.31 Q6.2 R18.1 | length 1166
  Top Layer w6: v2(2294,3042) 2308.75,3056.75 CN1.31@2407.46,3056.75
  Bottom Layer w6: v2(2294,3042) 2280,3028 2280,2798 2314,2764 2913.66,2764 R18.1 3032.86,2725.66 Q6.2
TP_SHUTDOWN_1V8: CN1.37 Q3.2 R9.1 | length 1657.5
  Top Layer w6: v2(2188,2982) 2312,2982 2339.51,3009.51 CN1.37
  Bottom Layer w6: v2(2188,2982) 2188,2548 2418,2318 2831.66,2318 R9.1 3029.83,2201.66 Q3.2
U1_A5: R25.2 U1.A5 | length 604.1
  Bottom Layer w6: R25.2 3034,3734 3170,3598 3346,3598 3381.48,3633.48 U1.A5
U1_B5: R10.2 U1.B5 | length 885.5
  Top Layer w6: v2(2986,3808) 3026,3768 3026,3682 3152,3556 3470,3556 3522,3608 v2(3522,3618)
  Bottom Layer w6: R10.2 2984,3810 v2(2986,3808) ; U1.B5 3499.59,3640.41 v2(3522,3618)
USB_D+: R13.2 U1.A6 U1.B6 | length 572
  Bottom Layer w6: U1.A6@3420.9,3682.7 3420.9,3718.8 3430,3728 3452,3728 3460.2,3719.8 U1.B6 3460.2,3639.8 3526,3574 3656,3574 3684,3546 3684,3446 3714,3416 R13.2@3714,3411.7
USB_D-: R1.2 U1.A7 U1.B7 | length 547.6
  Bottom Layer w6: U1.B7 3401.16,3636.84 3416,3622 3424,3622 3437.5,3635.5 3440.5,3635.5 ; U1.A7 3440.5,3635.5 ; R1.2@3640,3411.7 3640,3414 3668,3442 3668,3534 3646,3556 3520,3556 3440.5,3635.5
VSYS: C16.1 D1.1 LDO1.1 LDO1.3 | length 434.3
  Bottom Layer w18: LDO1.3 3029.4,3376.6 3012,3394 3012,3432 3031.4,3451.4 LDO1.1 3170.16,3451.4 C16.1
  Bottom Layer w24: D1.1 2964,3556.16 2964,3526 2980,3510 3028,3510 3057.89,3480.11 LDO1.1
XIN: C15.2 U2.20 X2.1 | length 611.2
  Bottom Layer w6: U2.20 3757.62,2722.38 3786,2694 3908,2694 3936,2666 3936,2611.85 X2.1 3979.21,2572.44 C15.2
XOUT: R2.2 U2.21 | length 276.5
  Bottom Layer w6: R2.2 3712,2698 3741.9,2727.9 U2.21
pads on no net: CN1.6 CN1.36 CN1.38 LDO1.4 SW3. SW3.3 SW3.4 SW4. SW4.3 SW4.4 U1. U1.A8 U1.B8

## Polygon pours and split planes (outlines as drawn)
EXTERN_5V on Bottom Layer (solid): 3322,3648 3540,3648 3540,3890 3322,3890
GND on Bottom Layer (solid): 5100,4260 5158,4202 5158,1664 5114,1620 1696,1620 1662,1654 1662,4094
GND on Top Layer (solid): 5314,4468 5278,4432 5278,1712 5066,1500 1500,1500 1526,1526 1560,4092

## Keep-outs
Keep-Out Layer:
  lines w10: 1874,2478 ccw(c2425.18,2478) 2425.18,1926.82 ; 4436.2,1926.82 ccw(c4436.2,2478) 4987.38,2478 ; 4865.33,3978 cw(c4865.33,3855.95) 4987.38,3855.96
  lines w10 net S$13251: 1874,3855.95 cw(c1996.05,3855.95) 1996.04,3978

## Other copper
Top Layer:
  pour cut-out: 2386,3352 2386,2932 2504,2932 2504,3350

## Silkscreen, mask and mechanical layers (free items; w line width, h text height)
Top Overlay:
  lines w5.91: 2072.42,2441.19 2072.42,3773.27 2617.83,3773.27 2617.83,3817.01 2931.96,3817.01 2931.96,3773.27 3239.08,3773.27 3239.08,3817.01 3724.2,3817.01 3724.2,3773.27 4788.28,3773.27 4788.28,2441.19 4676.94,2441.19 4676.94,2270.21 cw(c4617.29,2270.21) 4617.3,2210.56 4434.54,2210.56 ccw(c4434.55,1971.98) 4353.94,2196.53 4192.93,2138.74 cw(c4125.79,2325.88) 4125.76,2127.06 4058.09,2127.06 3829.57,2127.06 3829.57,2119.1 cw(c3821.62,2119.1) 3821.62,2111.15 3789.13,2111.15 3753.32,2111.15 cw(c3753.32,2119.1) 3745.37,2119.1 3745.37,2127.06 3111.28,2127.06 3111.28,2123.08 cw(c3099.35,2123.08) 3099.35,2111.15 3042.25,2111.15 cw(c3042.25,2123.08) 3030.32,2123.08 3030.32,2127.06 2938.62,2127.06 ccw(c2938.62,2087.3) 2898.86,2087.29 2898.86,2068.96 cw(c2869.04,2068.96) 2869.04,2039.14 2839.45,2039.14 2826.33,2029.35 cw(c2812.06,2048.47) 2812.06,2024.61 2774.29,2024.61 cw(c2774.29,2048.47) 2759.2,2029.99 2748.51,2038.72 2714.71,2038.72 cw(c2714.71,2068.54) 2684.89,2068.54 2684.89,2095.49 ccw(c2625.24,2095.49) 2643.81,2152.17 2501.78,2198.7 ccw(c2427.5,1971.98) 2427.5,2210.56 2243.4,2210.56 cw(c2243.41,2270.21) 2183.76,2270.21 2183.76,2441.19 2072.42,2441.19
Bottom Overlay:
  text "DESIGNED BY /   DZT" at 4860,2238 h80
  text "EN" at 3760,2194 h70 r90
  text "3V3" at 3860,2194 h70 r90
  text "DIO" at 3960,2193.99 h70 r90
  text "CLK" at 4060,2193.99 h70 r90
  text "GND" at 4160,2194 h70 r90
  text "BOOT" at 4260,2194 h70 r90
Document:
  lines w10: 2190.53,2875.64 2190.53,3422.88 cw(c2206.28,3422.88) 2206.28,3438.63 2320.45,3438.63 cw(c2320.45,3422.88) 2336.2,3422.88 2336.2,2875.64 cw(c2320.45,2875.64) 2320.45,2859.89 2206.28,2859.89 cw(c2206.28,2875.64) 2190.53,2875.64 ; 2202.34,3580.36 2202.34,3706.34 cw(c2218.09,3706.34) 2218.09,3722.09 2627.54,3722.09 cw(c2627.54,3706.34) 2643.29,3706.34 2643.29,3580.36 cw(c2627.54,3580.36) 2627.54,3564.61 2218.09,3564.61 cw(c2218.09,3580.36) 2202.34,3580.36
  lines w10 net S$7924: 3529,3846.19 4631.36,3846.19